# Altium PCB ICM20602.pcbdoc
Units mm, origin at the board's own origin, x right, y up, seen from the top; angles counter-clockwise.
Board outline 28.82 x 30.09 mm, 2 copper layers (Top Layer, Bottom Layer); 1 components, 0 nets, 16 pads, 0 vias.
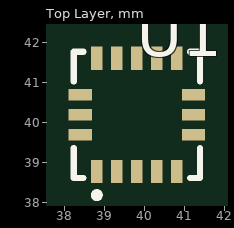
[diagram p0: Top Layer view]
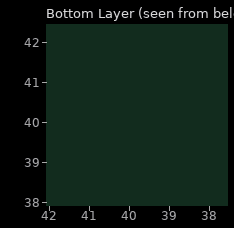
[diagram p1: Bottom Layer view, seen from below]

## Layer stack, top to bottom
Top Layer: signal copper (thickness not stored)
Dielectric: dielectric 0.32, FR-4, Dk 4.8
Bottom Layer: signal copper (thickness not stored)

## Board outline
54.22,25.4 25.4,25.4 25.4,55.488 54.22,55.488

## Components (designator, comment, footprint, x,y, rotation, side; value= is the part's Value field where it differs from the comment)
U1 "LGA-16_L3.0-W3.0-P0.50-BL" LGA-16_L3.0-W3.0-P0.50-BL 39.81,40.185 r0 top

## Footprints (in the part's own frame and the unit in brackets; to place one, negate y for a bottom-side part, rotate by r counter-clockwise, add the part's x,y. Pads: shape width x height; smd on the part's side, far side on the other; paste and mask are expansions set on the pad)
LGA-16_L3.0-W3.0-P0.50-BL [mm]
  rect 0.28x0.585 smd: 1(-1,-1.417) 2(-0.5,-1.417) 3(0,-1.417) 4(0.5,-1.417) 5(1,-1.417) 9(1,1.417) 10(0.5,1.417) 11(0,1.417) 12(-0.5,1.417) 13(-1,1.417)
  rect 0.585x0.28 smd: 6(1.417,-0.5) 7(1.417,0) 8(1.417,0.5) 14(-1.417,0.5) 15(-1.417,0) 16(-1.417,-0.5)
  silkscreen extent -1.58,-2.08 1.58,1.58

## Nets (pads, with @x,y where several pads share a name; then routed paths per layer and width w, separated by ;. In a path a pad name is that pad's centre, name@x,y a point inside that pad or via, vN(x,y) a via of type N, cw(c..) or ccw(c..) an arc to the next point about the centre after c; other vN are vias at no path point)
pads on no net: U1.1 U1.2 U1.3 U1.4 U1.5 U1.6 U1.7 U1.8 U1.9 U1.10 U1.11 U1.12 U1.13 U1.14 U1.15 U1.16